# Altium PCB Sensor_Box_CAN_Shutter_CTRL.PCBDOC (part 2 of 2)
Units mil, origin at the board's own origin, x right, y up, seen from the top; angles counter-clockwise.
Board outline 1496.06 x 1407.48 mil, 2 copper layers (Top, Bot), stack 61.855 mil thick; 75 components, 60 nets, 235 pads, 72 vias.
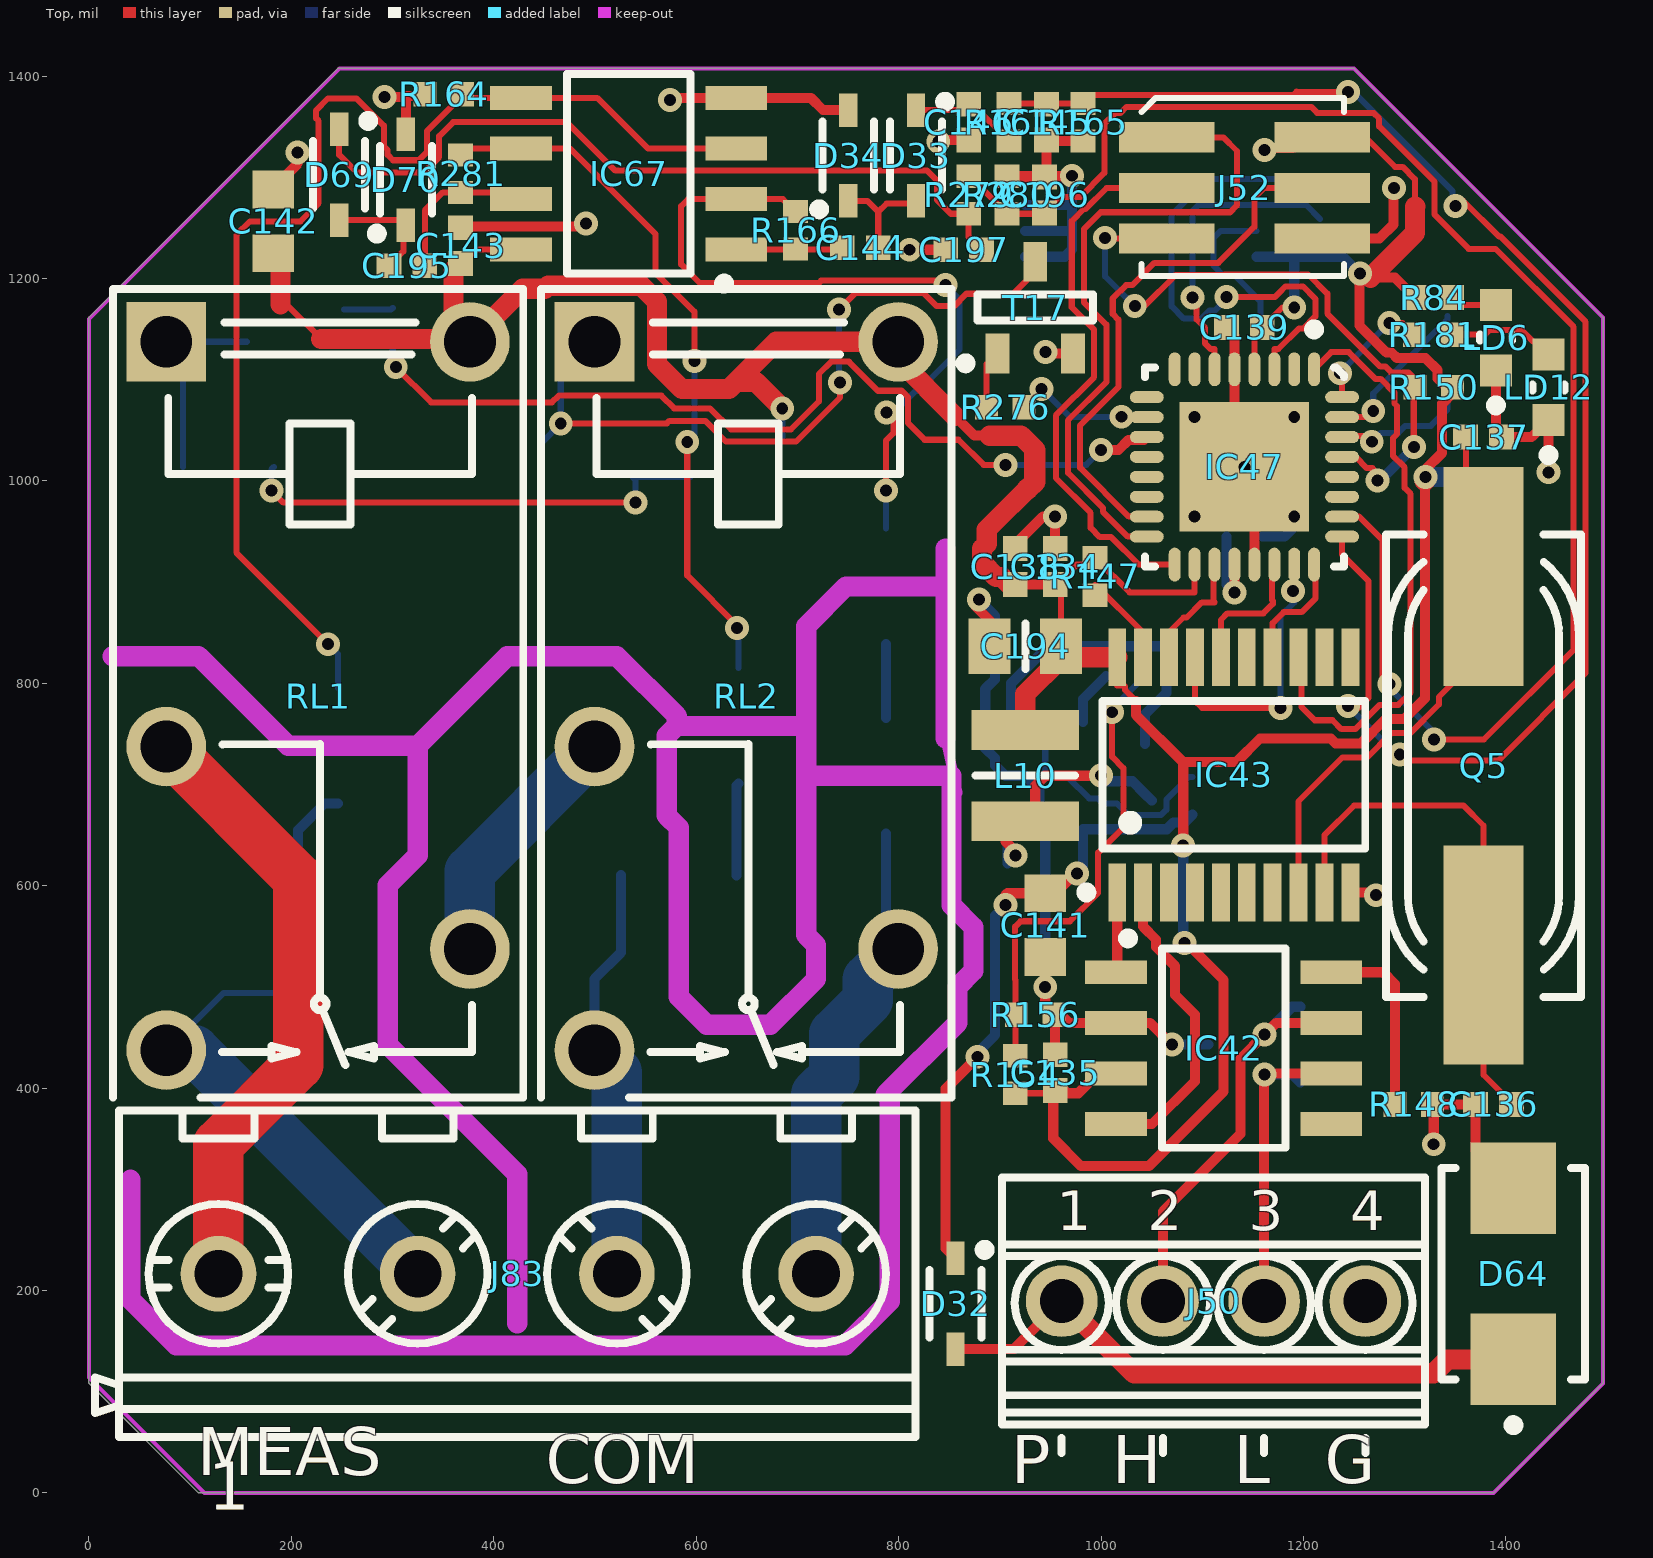
[diagram p0: Top view]

## Via types
v1: diameter 23.62, hole 11.81, Top to Bot, tented both sides, 72 vias

## Nets (pads, with @x,y where several pads share a name; then routed paths per layer and width w, separated by ;. In a path a pad name is that pad's centre, name@x,y a point inside that pad or via, vN(x,y) a via of type N, cw(c..) or ccw(c..) an arc to the next point about the centre after c; other vN are vias at no path point) (continued)
SCL1: (continued)
  Top w6: v1(1090.55,1181.1) v1@1094.49,1181.1 ; v1@1094.49,1181.1 1094.49,1159.45 1102.81,1151.13 1102.81,1135.64 1108.08,1130.37 1112.2,1130.37 IC47.6
  Bot w6: v1(1090.55,1181.1) 1090.55,1266.73 1096.46,1272.64 IC41.6 1202.56,1272.64 R153.1
SDA1: IC41.5 IC47.3 R152.1 | length 510.4
  Top w6: v1(1124.11,1181.59) 1171.84,1181.59 1176.04,1185.79 1182.32,1192.07 1199.57,1192.07 1211.76,1179.88 1211.76,1162.64 1199.56,1150.45 1195.46,1150.45 1175.38,1130.37 1171.26,1130.37 IC47.3
  Bot w6: v1(1124.11,1181.59) 1124.11,1179.62 1112.84,1168.36 1107.24,1168.36 1099.17,1160.29 1081.93,1160.29 1069.74,1172.48 1069.74,1262.89 1105.08,1298.23 IC41.5 1214.37,1298.23 R152.1
Tx: IC47.31 TP9.1 | length 157.5
  Top w6: IC47.31 1262.87,1062.99 v1(1269.01,1069.13)
  Bot w6: v1(1269.01,1069.13) 1269.01,1086.28 1342.18,1159.45 TP9.1
UMEAS1: J83.4 R158.1 RL2.4 | length 473.7
  Bot w10: R158.1 787.4,549.61 RL2.4
  Bot w50: J83.4 718.5,393.7 736.4,411.6 736.4,453.54 769.5,486.65 769.5,507.3 RL2.4
UMEAS2: J83.3 R277.1 RL2.3 | length 413.6
  Bot w10: RL2.3 499.61,507.87 525.59,533.86 R277.1
  Bot w50: RL2.3 521.65,415.35 J83.3
UMEAS_COM: J83.2 R162.1 RL1.3 | length 493.7
  Bot w6: RL1.3 133.07,494.1 R162.1
  Bot w50: RL1.3 103.94,437.4 J83.2
pads on no net: D68.2 IC42.5 IC43.3 IC43.4 IC43.5 IC43.6 IC43.7 IC43.11 IC43.12 IC43.15 IC47.2 IC47.7 IC47.8 IC47.9 IC47.12 IC47.13 IC47.14 IC47.27 IC47.28

## Polygon pours and split planes (outlines as drawn)
GND on Bot "Signal Layer 1-No Net 1" (solid, remove dead copper, pour order 0): 244.09,1409.45 248.03,1405.51 1251.97,1405.51 1496.06,1161.42 1496.06,106.3 1494.09,106.3 1387.8,0 846.46,0 846.46,421.26 870.08,444.88 870.08,940.94 3.94,940.94 3.94,1163.93 244.09,1404.09

## Keep-outs
KeepOutLayer:
  lines w3.94: 0,114.17 0,1159.99 247.49,1407.48 1250,1407.48 1496.06,1161.42 1496.06,108.27 1387.8,0 114.17,0 0,114.17
  lines w10: 846.46,745.41 858.27,691.6
  lines w20: 23.62,826.77 108.27,826.77 196.85,738.19 324.8,738.19 ; 41.18,309.45 41.18,190.75 86.26,145.67 747.4,145.67 791.18,189.45 791.18,299.45 791.18,389.92 ; 423.23,167.32 423.23,314.96 295.28,442.91 295.28,600.39 324.8,629.92 324.8,738.19 ; 698.82,757.87 580.71,757.87 ; 708.66,708.66 852.36,708.66 852.36,580.71 874.02,559.06 874.02,515.75 858.27,500 858.27,464.57 787.4,393.7 ; 842.52,895.67 748.03,895.67 708.66,856.3 708.66,551.18 718.5,541.34 718.5,507.77 673.33,462.6 610.24,462.6 582.68,490.16 582.68,657.48 570.87,669.29 570.87,748.03 580.71,757.87 ; 846.46,745.41 846.46,933.07 ; 324.8,738.19 413.39,826.77 521.65,826.77 580.71,767.72 580.71,757.87

## Silkscreen, mask and mechanical layers (free items; w line width, h text height)
TopOverlay:
  text "MEAS" at 107.18,17.45 h47.24
  text "COM" at 451.18,9.45 h47.24
  text "P" at 911.18,9.45 h47.24
  text "H" at 1011.18,9.45 h47.24
  text "L" at 1131.18,9.45 h47.24
  text "G" at 1221.18,9.45 h47.24
BottomOverlay:
  lines w3.94: 1448.82,1007.87 1452.76,1003.94 1452.76,944.88
  text "Tx" at 1262.93,1125.98 h60
  text "Rx" at 1267.72,1051.18 h60
  text "Vcc" at 1314.96,940.94 h60
  text "GND" at 1474.41,921.26 h60 r90
  text "Shutter" at 1019.68,417.32 h60
  text "CTRL" at 1003.94,331.18 h60
  text "v1.0" at 1003.94,255.91 h60
Mechanical1:
  lines w10: 1082.68,1407.48 403.54,1407.48 246.06,1407.48 0,1161.42 0,108.27 108.27,0 1387.8,0 1496.06,108.27 1496.06,1161.42 1250,1407.48 1082.68,1407.48 ; 1082.68,1407.48 1082.68,1407.48 ; 305.12,1407.48 305.12,1407.48

## Text inside footprints (layer, text, board x,y; h text height)
J50: TopOverlay "3" at 1146.18,259.45 h39.37; TopOverlay "2" at 1046.18,259.45 h39.37; TopOverlay "1" at 956.18,259.45 h39.37; TopOverlay "4" at 1246.18,259.45 h39.37
J83: TopOverlay "1" at 118.11,-16.73 h47.24; Mechanical14 "1" at 51.18,282.48 h47.24